# EAGLE board Address and TMP V1.0 (EAGLE 9.6.2)
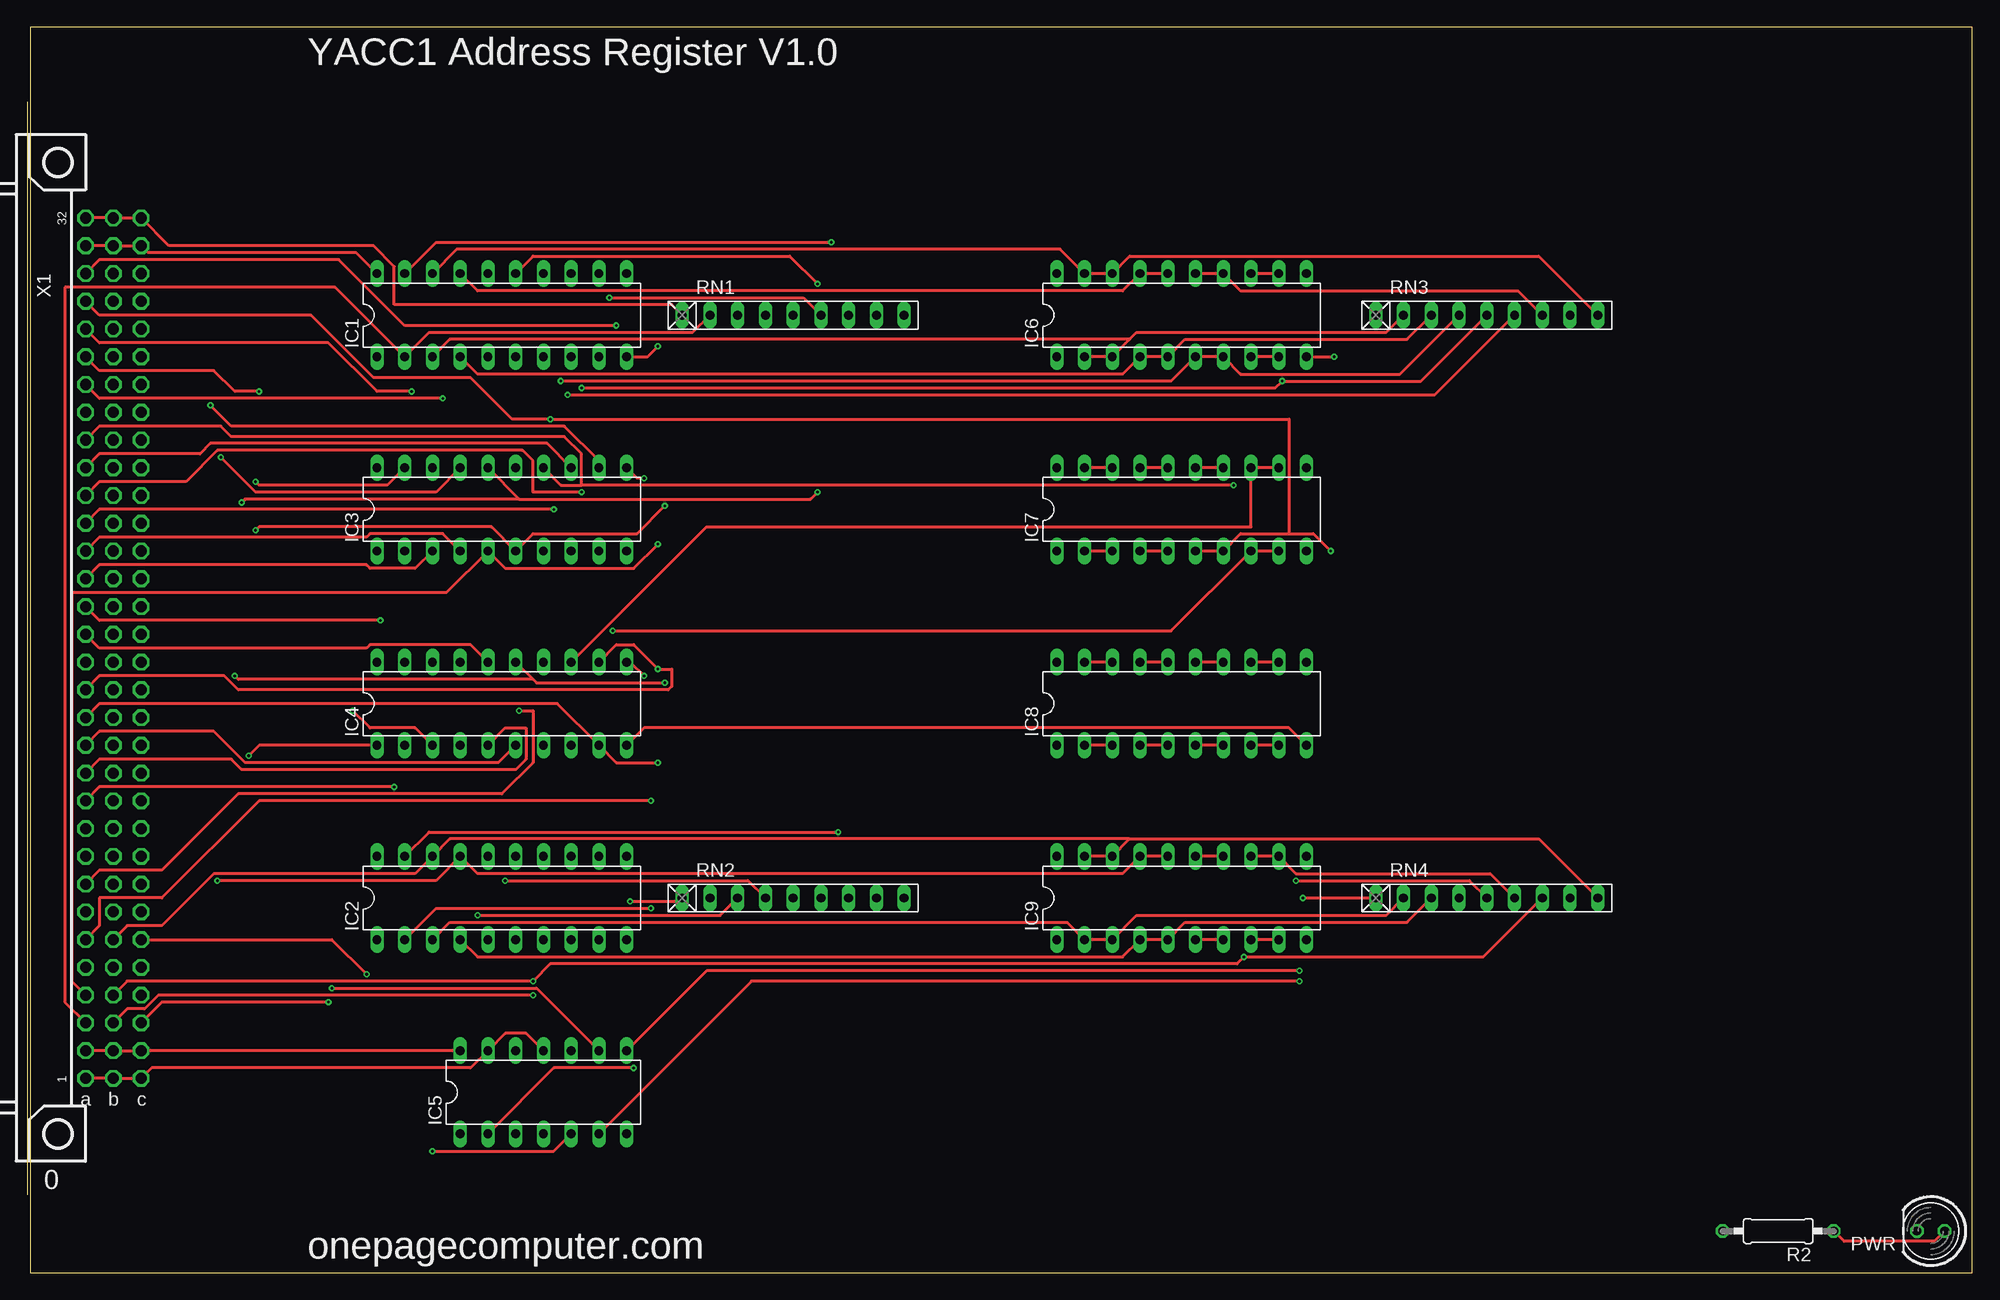
[diagram p0: board, top side]
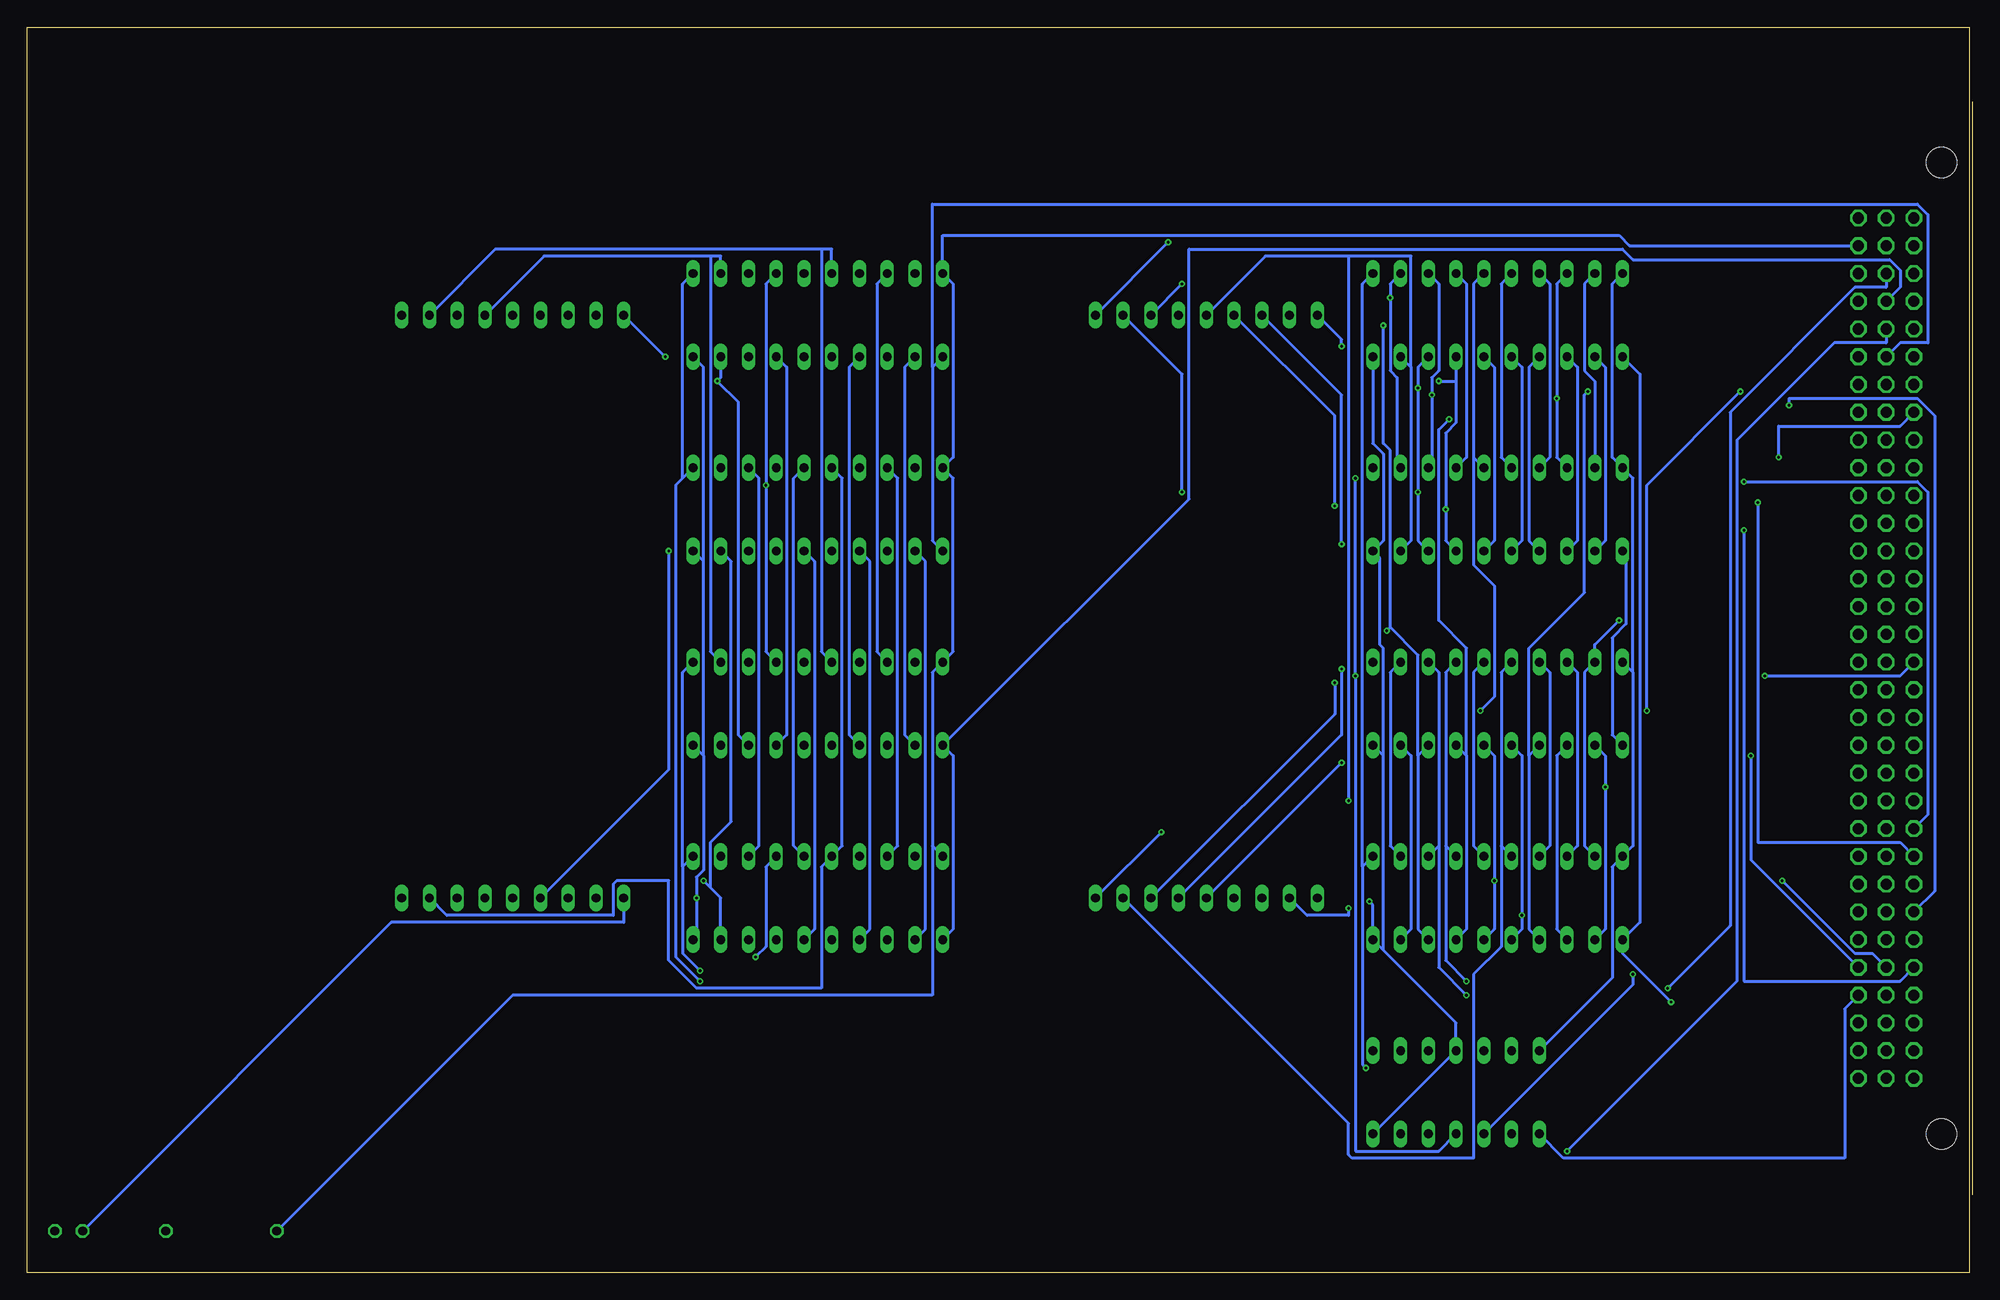
[diagram p1: board, bottom side, seen from below]

Size 177.78 x 113.97 mm. Coordinates in mm from the lower left corner, seen from the top.
Outline: 0,0 177.78,0 177.78,113.97 0,113.97 0,0
Copper layers (1*16): Top 0.035559375mm / dielectric 1.6mm / Bottom 0.035559375mm
Design rules "oshpark-2layer-auto-routing": minimum track width 10mil, minimum drill 10mil, track to track 10mil, track to pad 8mil, pad to pad 8mil, via to via 8mil, smd to smd 6mil, copper to edge 15mil, drill to drill 6mil, minimum pad ring 6mil, minimum via ring 6mil, stop-mask expansion 2.5mil, vias tented up to drill 0mil, thermal gap 10mil
Net classes: 1 GND: width 1 mm; 2 5V: width 1 mm

## Footprints (pad centres in the part's own frame; a part is rotated, then mirrored left to right if it is on the bottom)
DIL20 = drill 0.813 long: 1 -11.43,-3.81; 2 -8.89,-3.81; 3 -6.35,-3.81; 4 -3.81,-3.81; 5 -1.27,-3.81; 6 1.27,-3.81; 7 3.81,-3.81; 8 6.35,-3.81; 9 8.89,-3.81; 10 11.43,-3.81; 11 11.43,3.81; 12 8.89,3.81; 13 6.35,3.81; 14 3.81,3.81; 15 1.27,3.81; 16 -1.27,3.81; 17 -3.81,3.81; 18 -6.35,3.81; 19 -8.89,3.81; 20 -11.43,3.81
DIL14 = drill 0.813 long: 1 -7.62,-3.81; 2 -5.08,-3.81; 3 -2.54,-3.81; 4 0,-3.81; 5 2.54,-3.81; 6 5.08,-3.81; 7 7.62,-3.81; 8 7.62,3.81; 9 5.08,3.81; 10 2.54,3.81; 11 0,3.81; 12 -2.54,3.81; 13 -5.08,3.81; 14 -7.62,3.81
LED5MM = drill 0.813 octagon: A -1.27,0; K 1.27,0
0207/10 = drill 0.813 octagon: 1 -5.08,0; 2 5.08,0
RN-9 = drill 0.813 long: 1 -10.16,0; 2 -7.62,0; 3 -5.08,0; 4 -2.54,0; 5 0,0; 6 2.54,0; 7 5.08,0; 8 7.62,0; 9 10.16,0
FABC96R = drill 1.016 octagon: A1 -2.54,39.37; A2 -2.54,36.83; A3 -2.54,34.29; A4 -2.54,31.75; A5 -2.54,29.21; A6 -2.54,26.67; A7 -2.54,24.13; A8 -2.54,21.59; A9 -2.54,19.05; A10 -2.54,16.51; A11 -2.54,13.97; A12 -2.54,11.43; A13 -2.54,8.89; A14 -2.54,6.35; A15 -2.54,3.81; A16 -2.54,1.27; A17 -2.54,-1.27; A18 -2.54,-3.81; A19 -2.54,-6.35; A20 -2.54,-8.89; A21 -2.54,-11.43; A22 -2.54,-13.97; A23 -2.54,-16.51; A24 -2.54,-19.05; A25 -2.54,-21.59; A26 -2.54,-24.13; A27 -2.54,-26.67; A28 -2.54,-29.21; A29 -2.54,-31.75; A30 -2.54,-34.29; A31 -2.54,-36.83; A32 -2.54,-39.37; B1 -5.08,39.37; B2 -5.08,36.83; B3 -5.08,34.29; B4 -5.08,31.75; B5 -5.08,29.21; B6 -5.08,26.67; B7 -5.08,24.13; B8 -5.08,21.59; B9 -5.08,19.05; B10 -5.08,16.51; B11 -5.08,13.97; B12 -5.08,11.43; B13 -5.08,8.89; B14 -5.08,6.35; B15 -5.08,3.81; B16 -5.08,1.27; B17 -5.08,-1.27; B18 -5.08,-3.81; B19 -5.08,-6.35; B20 -5.08,-8.89; B21 -5.08,-11.43; B22 -5.08,-13.97; B23 -5.08,-16.51; B24 -5.08,-19.05; B25 -5.08,-21.59; B26 -5.08,-24.13; B27 -5.08,-26.67; B28 -5.08,-29.21; B29 -5.08,-31.75; B30 -5.08,-34.29; B31 -5.08,-36.83; B32 -5.08,-39.37; C1 -7.62,39.37; C2 -7.62,36.83; C3 -7.62,34.29; C4 -7.62,31.75; C5 -7.62,29.21; C6 -7.62,26.67; C7 -7.62,24.13; C8 -7.62,21.59; C9 -7.62,19.05; C10 -7.62,16.51; C11 -7.62,13.97; C12 -7.62,11.43; C13 -7.62,8.89; C14 -7.62,6.35; C15 -7.62,3.81; C16 -7.62,1.27; C17 -7.62,-1.27; C18 -7.62,-3.81; C19 -7.62,-6.35; C20 -7.62,-8.89; C21 -7.62,-11.43; C22 -7.62,-13.97; C23 -7.62,-16.51; C24 -7.62,-19.05; C25 -7.62,-21.59; C26 -7.62,-24.13; C27 -7.62,-26.67; C28 -7.62,-29.21; C29 -7.62,-31.75; C30 -7.62,-34.29; C31 -7.62,-36.83; C32 -7.62,-39.37 | hole 2.794: 0,-44.456; 0,44.456

## Placement (x,y rotation side)
IC1  74LS373N  [DIL20]  43.18,87.63 0 top
IC2  74LS373N  [DIL20]  43.18,34.29 0 top
IC3  74LS373N  [DIL20]  43.18,69.85 0 top
IC4  74LS373N  [DIL20]  43.18,52.07 0 top
IC5  74LS04N  [DIL14]  46.99,16.51 0 top
IC6  74LS373N  [DIL20]  105.41,87.63 0 top
IC7  74LS373N  [DIL20]  105.41,69.85 0 top
IC8  74LS373N  [DIL20]  105.41,52.07 0 top
IC9  74LS373N  [DIL20]  105.41,34.29 0 top
PWR  [LED5MM]  173.99,3.81 180 top
R2  330  [0207/10]  160.02,3.81 180 top
RN1  [RN-9]  69.85,87.63 0 top
RN2  [RN-9]  69.85,34.29 0 top
RN3  [RN-9]  133.35,87.63 0 top
RN4  [RN-9]  133.35,34.29 0 top
X1  FABC96R  [FABC96R]  2.54,57.15 180 top

## Library data of the parts
IC1-IC9 = 74xx-us
PWR = led
R2 = eagle-ltspice; SPICEMODEL: NONE; SPICEPREFIX: R
RN1-RN4 = resistor-net; OC_FARNELL: unknown; OC_NEWARK: unknown
X1 = con-vg

## Nets
-AC-LD: X1.C22
-AC-LD-INV: X1.C20
-AC-RD: X1.C21
-ADDR-REG-LD0: IC5.1 X1.C4
-ADDR-REG-LD1: IC5.3 X1.C6
-ADDR-REG-RD0: IC1.1 IC2.1 X1.C3
-ADDR-REG-RD1: IC3.1 IC4.1 X1.C5
-ALU-FUNC: X1.C15
-BUS-EN: X1.C28
-HL-SWAP: X1.C25
-INT: X1.C13
-INTA: X1.C14
-IO-ADDR-LD: X1.C11
-IO-RD: X1.B25
-IO-WR: X1.B26
-MEM-RD: X1.B23
-MEM-WR: X1.B24
-REG-DN: X1.B21
-REG-FUNC-LD: X1.B8
-REG-FUNC-RD: X1.B7
-REG-LD-HI: X1.B20
-REG-LD-LO: X1.B18
-REG-RD-HI: X1.B19
-REG-RD-LO: X1.B17
-REG-UP: X1.B22
-RESET: X1.C30
-RUN: X1.C29
-SR-LD: X1.C23
-TMP-REG-LD0: IC5.5 X1.B28
-TMP-REG-LD1: IC5.9 X1.B30
-TMP-REG-RD0: IC6.1 IC7.1 X1.B27
-TMP-REG-RD1: IC8.1 IC9.1 X1.B29
ADDR0: IC1.2 IC3.2 RN1.2 X1.A3
ADDR1: IC1.5 IC3.5 RN1.3 X1.A4
ADDR2: IC1.6 IC3.6 RN1.4 X1.A5
ADDR3: IC1.9 IC3.9 RN1.5 X1.A6
ADDR4: IC1.12 IC3.12 RN1.6 X1.A7
ADDR5: IC1.15 IC3.15 RN1.7 X1.A8
ADDR6: IC1.16 IC3.16 RN1.8 X1.A9
ADDR7: IC1.19 IC3.19 RN1.9 X1.A10
ADDR8: IC2.2 IC4.2 RN2.2 X1.A11
ADDR9: IC2.5 IC4.5 RN2.3 X1.A12
ADDR10: IC2.6 IC4.6 RN2.4 X1.A13
ADDR11: IC2.9 IC4.9 RN2.5 X1.A14
ADDR12: IC2.12 IC4.12 RN2.6 X1.A15
ADDR13: IC2.15 IC4.15 RN2.7 X1.A16
ADDR14: IC2.16 IC4.16 RN2.8 X1.A17
ADDR15: IC2.19 IC4.19 RN2.9 X1.A18
ALU0: X1.C16
ALU1: X1.C17
ALU2: X1.C18
ALU3: X1.C19
BR-COND: X1.C24
DATA0: IC1.3 IC3.3 IC6.2 IC6.3 IC8.2 IC8.3 RN3.2 X1.A19
DATA1: IC1.4 IC3.4 IC6.4 IC6.5 IC8.4 IC8.5 RN3.3 X1.A20
DATA2: IC1.7 IC3.7 IC6.6 IC6.7 IC8.6 IC8.7 RN3.4 X1.A21
DATA3: IC1.8 IC3.8 IC6.8 IC6.9 IC8.8 IC8.9 RN3.5 X1.A22
DATA4: IC1.13 IC3.13 IC6.12 IC6.13 IC8.12 IC8.13 RN3.6 X1.A23
DATA5: IC1.14 IC3.14 IC6.14 IC6.15 IC8.14 IC8.15 RN3.7 X1.A24
DATA6: IC1.17 IC3.17 IC6.16 IC6.17 IC8.16 IC8.17 RN3.8 X1.A25
DATA7: IC1.18 IC3.18 IC6.18 IC6.19 IC8.18 IC8.19 RN3.9 X1.A26
DATA8: IC2.3 IC4.3 IC7.2 IC7.3 IC9.2 IC9.3 RN4.2 X1.A27
DATA9: IC2.4 IC4.4 IC7.4 IC7.5 IC9.4 IC9.5 RN4.3 X1.A28
DATA10: IC2.7 IC4.7 IC7.6 IC7.7 IC9.6 IC9.7 RN4.4 X1.A29
DATA11: IC2.8 IC4.8 IC7.8 IC7.9 IC9.8 IC9.9 RN4.5 X1.A30
DATA12: IC2.13 IC4.13 IC7.12 IC7.13 IC9.12 IC9.13 RN4.6 X1.B3
DATA13: IC2.14 IC4.14 IC7.14 IC7.15 IC9.14 IC9.15 RN4.7 X1.B4
DATA14: IC2.17 IC4.17 IC7.16 IC7.17 IC9.16 IC9.17 RN4.8 X1.B5
DATA15: IC2.18 IC4.18 IC7.18 IC7.19 IC9.18 IC9.19 RN4.9 X1.B6
GND: IC1.10 IC2.10 IC3.10 IC4.10 IC5.7 IC5.11 IC5.13 IC6.10 IC7.10 IC8.10 IC9.10 PWR.K RN1.1 RN2.1 RN3.1 RN4.1 X1.A1 X1.A32 X1.B1 X1.B32 X1.C1 X1.C32
IN: X1.C26
IO-ADDR0: X1.C7
IO-ADDR1: X1.C8
IO-ADDR2: X1.C9
IO-ADDR3: X1.C10
N$1: IC1.11 IC2.11 IC5.2
N$2: IC3.11 IC4.11 IC5.4
N$3: IC5.6 IC6.11 IC7.11
N$4: IC5.8 IC8.11 IC9.11
N$11: PWR.A R2.1
OUT: X1.C27
REG-LD-ID0: X1.B13
REG-LD-ID1: X1.B14
REG-LD-ID2: X1.B15
REG-LD-ID3: X1.B16
REG-RD-ID0: X1.B9
REG-RD-ID1: X1.B10
REG-RD-ID2: X1.B11
REG-RD-ID3: X1.B12
UNUSED0: X1.C12
VCC: IC1.20 IC2.20 IC3.20 IC4.20 IC5.14 IC6.20 IC7.20 IC8.20 IC9.20 R2.2 X1.A2 X1.A31 X1.B2 X1.B31 X1.C2 X1.C31

## Tracks (layer width: path | path; a pad name or v marks a point on that pad's centre or on a via)
-ADDR-REG-LD0
  Bottom 0.254: IC5.1 37.15,10.48 11.43,10.48 11.43,24.13 X1.C4
-ADDR-REG-LD1  (via drill 0.25)
  Top 0.254: v30.8,27.3 27.62,30.48 X1.C6
  Bottom 0.254: IC5.3 30.8,26.35 v30.8,27.3
-ADDR-REG-RD0  (via drill 0.25)
  Top 0.254: X1.C3 12.06,24.77 v27.3,24.77
  Bottom 0.254: IC1.1 30.16,82.23 30.16,32.07 IC2.1 31.75,29.21 v27.3,24.77
-ADDR-REG-RD1  (via drill 0.25)
  Top 0.254: v20,47.31 20.95,48.26 IC4.1
  Bottom 0.254: IC4.1 32.7,49.21 32.7,58.1 31.43,59.37 31.43,65.72 IC3.1 | X1.C5 20,37.78 v20,47.31
-TMP-REG-LD0  (via drill 0.25)
  Top 0.254: IC5.5 47.94,11.11 v36.83,11.11
  Bottom 0.254: v36.83,11.11 21.27,26.67 21.27,76.2 12.38,85.09 7.62,85.09 X1.B28
-TMP-REG-LD1  (via drill 0.25)
  Top 0.254: IC5.9 46.35,26.04 v27.62,26.04
  Bottom 0.254: v27.62,26.04 21.91,31.75 21.91,78.74 10.48,90.17 7.62,90.17 X1.B30
-TMP-REG-RD0
  Bottom 0.254: IC7.1 94.93,66.99 94.93,82.87 | IC6.1 94.93,82.87 | X1.B27 6.35,85.09 3.81,85.09 3.81,96.84 4.76,97.79 94.93,97.79 94.93,82.87
-TMP-REG-RD1
  Bottom 0.254: IC9.1 93.03,31.43 93.03,47.31 IC8.1 71.44,70.8 71.44,93.66 31.75,93.66 30.8,92.71 7.3,92.71 6.35,91.76 6.35,90.17 X1.B29
ADDR0
  Top 0.254: RN1.2 60.64,86.04 36.51,86.04 IC1.2 27.94,90.17 3.17,90.17 3.17,24.77 X1.A3
  Bottom 0.254: IC3.2 33.34,66.99 33.34,82.87 IC1.2
ADDR1  (via drill 0.25)
  Top 0.254: v57.47,66.67 55.24,64.45 43.5,64.45 IC3.5 38.1,62.23 3.81,62.23 3.81,26.67 X1.A4
  Bottom 0.254: IC3.5 40.96,66.99 40.96,82.87 IC1.5 | RN1.3 57.47,80.33 v57.47,66.67
ADDR2  (via drill 0.25)
  Top 0.254: v58.1,70.17 55.56,67.63 46.04,67.63 IC3.6 42.23,68.26 20.95,68.26 v20.64,67.94
  Bottom 0.254: IC3.6 43.5,66.99 43.5,82.87 IC1.6 | RN1.4 58.1,78.42 v58.1,70.17 | X1.A5 6.35,26.67 20.64,26.67 v20.64,67.94
ADDR3  (via drill 0.25)
  Top 0.254: X1.A6 6.35,31.75 6.35,34.29 12.06,34.29 20.95,43.18 v56.83,43.18
  Bottom 0.254: IC3.9 51.12,66.99 51.12,82.87 | IC1.9 51.12,82.87 | RN1.5 64.45,93.03 56.83,93.03 | 56.83,93.03 51.12,93.03 51.12,82.87 | 56.83,93.03 v56.83,43.18
ADDR4  (via drill 0.25)
  Top 0.254: RN1.6 70.8,89.22 v53.02,89.22 | v16.51,79.38 18.41,77.47 48.9,77.47 52.07,74.3 IC3.12
  Bottom 0.254: IC3.12 52.39,73.98 52.39,81.92 53.02,82.55 v53.02,89.22 53.02,90.49 IC1.12 | X1.A7 3.17,34.92 3.17,78.42 4.76,80.01 16.51,80.01 v16.51,79.38
ADDR5  (via drill 0.25)
  Top 0.254: v72.07,90.49 69.53,93.03 46.04,93.03 IC1.15 | X1.A8 6.35,36.83 12.06,36.83 19.05,43.81 43.18,43.81 46.04,46.67 46.04,51.44 v44.77,51.44
  Bottom 0.254: 45.4,74.61 IC3.15 | 45.4,74.61 45.4,90.49 IC1.15 | v72.07,90.49 RN1.7 | v44.77,51.44 43.5,52.7 43.5,62.87 45.4,64.77 45.4,74.61
ADDR6  (via drill 0.25)
  Top 0.254: v72.07,71.44 71.44,70.8 44.77,70.8 | IC3.16 44.77,70.8 | v19.37,70.48 19.68,70.8 44.77,70.8
  Bottom 0.254: IC3.16 42.86,74.61 42.86,90.49 IC1.16 | RN1.8 72.07,82.23 v72.07,71.44 | X1.A9 6.35,39.37 19.37,39.37 v19.37,70.48
ADDR7  (via drill 0.25)
  Top 0.254: v73.34,94.3 37.15,94.3 IC1.19 | v20.64,72.39 20.95,72.07 32.7,72.07 IC3.19
  Bottom 0.254: IC3.19 34.29,81.6 35.24,82.55 35.24,90.49 IC1.19 | v73.34,94.3 RN1.9 | X1.A10 3.81,41.91 3.81,71.44 4.76,72.39 v20.64,72.39
ADDR8  (via drill 0.25)
  Top 0.254: v56.83,33.34 37.15,33.34 IC2.2 | X1.A11 6.35,44.45 v33.34,44.45
  Bottom 0.254: IC2.2 33.34,31.43 v33.34,44.45 33.34,47.31 IC4.2 | RN2.2 60.64,32.7 56.83,32.7 v56.83,33.34
ADDR9  (via drill 0.25)
  Top 0.254: RN2.3 63.18,32.7 v40.96,32.7 | X1.A12 6.35,46.99 18.41,46.99 19.37,46.04 44.45,46.04 45.4,46.99 45.4,49.85 43.5,49.85 IC4.5
  Bottom 0.254: IC2.5 40.96,31.43 v40.96,32.7 40.96,47.31 IC4.5
ADDR10  (via drill 0.25)
  Top 0.254: RN2.4 65.72,35.88 v43.5,35.88 | X1.A13 6.35,49.53 16.83,49.53 19.68,46.67 42.86,46.67 IC4.6
  Bottom 0.254: IC2.6 43.5,31.43 v43.5,35.88 43.5,47.31 IC4.6
ADDR11  (via drill 0.25)
  Top 0.254: v57.47,46.67 53.66,46.67 IC4.9 48.26,52.07 6.35,52.07 X1.A14
  Bottom 0.254: IC2.9 51.12,31.43 51.12,47.31 IC4.9 | v57.47,46.67 RN2.5
ADDR12  (via drill 0.25)
  Top 0.254: IC4.12 53.66,57.47 55.24,57.47 v57.47,55.24 58.74,55.24 58.74,53.66 58.42,53.34 19.05,53.34 17.78,54.61 6.35,54.61 X1.A15
  Bottom 0.254: IC2.12 53.02,39.05 53.02,54.93 IC4.12 | RN2.6 57.47,49.21 v57.47,55.24
ADDR13  (via drill 0.25)
  Top 0.254: v58.1,53.98 46.35,53.98 46.04,54.29 | IC4.15 46.04,54.29 | v18.73,54.61 19.05,54.29 46.04,54.29
  Bottom 0.254: IC2.15 45.4,39.05 45.4,54.93 IC4.15 | RN2.7 58.1,51.12 v58.1,53.98 | X1.A16 6.35,54.61 v18.73,54.61
ADDR14
  Top 0.254: X1.A17 6.35,57.15 30.8,57.15 31.11,57.47 40.32,57.47 IC4.16
  Bottom 0.254: 42.86,39.05 IC2.16 | 42.86,39.05 42.86,54.93 IC4.16 | RN2.8 56.83,13.65 56.83,10.79 56.52,10.48 45.4,10.48 45.4,27.3 42.86,29.84 42.86,39.05
ADDR15  (via drill 0.25)
  Top 0.254: v73.98,40.32 36.51,40.32 IC2.19 | X1.A18 6.35,59.69 v32.07,59.69
  Bottom 0.254: IC2.19 35.24,39.05 35.24,54.93 IC4.19 34.29,57.47 v32.07,59.69 | v73.98,40.32 RN2.9
DATA0
  Top 0.254: X1.A19 6.35,64.77 30.8,64.77 31.11,64.45 35.24,64.45 IC3.3 | IC8.3 IC8.2 | IC6.2 IC6.3 100.65,85.41 | RN3.2 124.14,86.04 101.28,86.04 100.65,85.41 | IC1.3 38.42,85.41 100.65,85.41
  Bottom 0.254: IC3.3 35.88,66.99 35.88,82.87 IC1.3 | IC8.2 97.47,49.21 97.47,82.87 IC6.2
DATA1
  Top 0.254: X1.A20 6.35,67.31 30.8,67.31 31.11,67.63 37.78,67.63 IC3.4 | IC8.5 IC8.4 | RN3.3 126.05,85.41 105.73,85.41 IC6.5 IC6.4 100.01,82.23 40.96,82.23 IC1.4
  Bottom 0.254: IC3.4 40.32,66.99 40.32,82.87 IC1.4 | IC8.4 102.55,49.21 102.55,82.87 IC6.4
DATA2  (via drill 0.25)
  Top 0.254: X1.A21 6.35,69.85 v47.94,69.85 | IC8.7 IC8.6 | RN3.4 125.41,82.23 110.81,82.23 IC6.7 IC6.6 104.46,81.6 v48.58,81.6
  Bottom 0.254: IC3.7 47.94,66.99 v47.94,69.85 47.94,76.83 46.99,77.79 46.99,81.6 | IC1.7 46.99,81.6 | IC8.7 108.27,49.21 108.27,82.87 IC6.7 | v48.58,81.6 46.99,81.6
DATA3  (via drill 0.25)
  Top 0.254: IC8.9 IC8.8 | IC6.9 IC6.8 | RN3.5 127.32,81.6 v114.62,81.6 113.98,80.96 v50.48,80.96 | X1.A22 6.35,72.39 14.29,72.39 17.14,75.25 45.09,75.25 46.04,74.3 46.04,71.44 v50.48,71.44
  Bottom 0.254: IC6.9 114.3,81.92 v114.62,81.6 112.71,79.69 112.71,49.21 IC8.8 | IC3.8 50.48,66.99 v50.48,71.44 v50.48,80.96 50.48,82.87 IC1.8
DATA4  (via drill 0.25)
  Top 0.254: IC8.12 IC8.13 | IC6.12 IC6.13 | X1.A23 6.35,74.93 15.56,74.93 16.51,75.88 47.31,75.88 IC3.13 | RN3.6 128.59,80.33 v49.21,80.33
  Bottom 0.254: RN3.6 130.49,93.03 115.25,93.03 | 115.25,93.03 114.3,93.03 IC6.12 | IC8.12 115.25,56.83 115.25,93.03 | IC3.13 49.21,73.98 v49.21,80.33 49.21,81.92 48.58,82.55 48.58,90.49 IC1.13
DATA5  (via drill 0.25)
  Top 0.254: X1.A24 6.35,77.47 17.46,77.47 18.41,76.52 48.9,76.52 50.48,74.93 50.48,72.07 | 50.48,72.07 48.58,72.07 IC3.14 | IC8.14 IC8.15 | IC6.15 IC6.14 110.81,89.85 136.21,89.85 RN3.7 | v110.17,72.07 50.48,72.07
  Bottom 0.254: IC3.14 46.04,74.61 46.04,90.49 IC1.14 | IC8.14 110.17,56.83 v110.17,72.07 110.17,90.49 IC6.14
DATA6  (via drill 0.25)
  Top 0.254: v17.46,74.61 20.64,71.44 37.15,71.44 IC3.17 | IC8.16 IC8.17 | IC6.16 IC6.17 100.01,89.85 40.96,89.85 IC1.17
  Bottom 0.254: IC3.17 38.42,74.61 38.42,90.49 IC1.17 | X1.A25 6.35,77.47 17.46,77.47 v17.46,74.61 | RN3.8 134.94,93.66 105.09,93.66 | 105.09,93.66 104.14,93.66 IC6.16 | IC8.16 105.09,56.83 105.09,93.66
DATA7  (via drill 0.25)
  Top 0.254: X1.A26 6.35,80.01 v37.78,80.01 | IC8.18 IC8.19 | RN3.9 138.11,93.03 100.65,93.03 IC6.18 IC6.19 94.3,93.66 39.05,93.66 IC1.18
  Bottom 0.254: IC3.18 37.78,74.61 v37.78,80.01 37.78,90.49 IC1.18 | IC8.18 100.01,56.83 100.01,90.49 IC6.18
DATA8  (via drill 0.25)
  Top 0.254: IC7.3 IC7.2 | RN4.2 124.14,32.7 101.28,32.7 IC9.3 IC9.2 94.93,32.07 38.42,32.07 IC2.3 | X1.A27 6.35,82.55 16.83,82.55 18.73,80.64 v20.95,80.64 | v29.53,51.44 31.11,49.85 35.24,49.85 IC4.3
  Bottom 0.254: IC7.2 95.57,65.09 95.57,31.43 IC9.2 | IC2.3 37.78,31.43 37.78,47.31 IC4.3 | v20.95,80.64 29.53,72.07 v29.53,51.44
DATA9  (via drill 0.25)
  Top 0.254: IC7.5 IC7.4 | RN4.3 126.05,32.07 105.73,32.07 IC9.5 IC9.4 100.01,28.89 40.96,28.89 IC2.4 | X1.A28 6.35,85.09 27.3,85.09 31.75,80.64 v34.92,80.64
  Bottom 0.254: IC7.4 100.65,65.09 100.65,31.43 IC9.4 | IC2.4 40.32,31.43 40.32,47.31 | IC4.4 40.32,47.31 | v34.92,80.64 35.24,80.33 35.24,62.23 40.32,57.15 40.32,47.31
DATA10  (via drill 0.25)
  Top 0.254: IC9.7 IC9.6 | IC7.6 IC7.7 110.81,67.63 115.25,67.63 | v119.06,66.04 117.47,67.63 115.25,67.63 | X1.A29 6.35,87.63 25.72,87.63 31.43,81.92 40.32,81.92 44.13,78.11 v47.62,78.11 115.25,78.11 115.25,67.63
  Bottom 0.254: RN4.4 119.06,46.04 v119.06,66.04 | IC9.6 105.73,31.43 105.73,65.09 IC7.6 | IC2.7 46.04,31.43 46.04,47.31 | IC4.7 46.04,47.31 | v47.62,78.11 48.58,77.15 48.58,59.69 46.04,57.15 46.04,47.31
DATA11  (via drill 0.25)
  Top 0.254: IC7.9 IC7.8 104.46,58.74 v53.34,58.74 | IC9.9 IC9.8 | RN4.5 131.76,35.88 v115.89,35.88 | X1.A30 6.35,92.71 28.26,92.71 34.29,86.68 v53.66,86.68
  Bottom 0.254: 115.25,35.24 114.3,34.29 IC9.9 | 115.25,35.24 v115.89,35.88 | IC7.9 113.35,65.09 113.35,41.27 115.25,39.37 115.25,35.24 | IC2.8 50.48,31.43 50.48,47.31 | IC4.8 50.48,47.31 | v53.66,86.68 53.66,75.88 53.02,75.25 53.02,59.05 | 53.02,59.05 50.48,56.52 50.48,47.31 | 53.02,59.05 v53.34,58.74
DATA12  (via drill 0.25)
  Top 0.254: IC7.12 IC7.13 111.76,68.26 61.91,68.26 IC4.13 | IC9.13 IC9.12 115.89,36.51 133.67,36.51 RN4.6 | X1.B3 8.89,24.13 10.48,24.13 11.75,25.4 v46.04,25.4
  Bottom 0.254: IC7.13 110.81,72.71 110.81,39.05 IC9.13 | 48.58,39.05 IC2.13 | 48.58,39.05 48.58,54.93 IC4.13 | v46.04,25.4 48.58,27.94 48.58,39.05
DATA13  (via drill 0.25)
  Top 0.254: X1.B4 8.89,26.67 v46.04,26.67 47.62,28.26 110.49,28.26 v111.12,28.89 133.03,28.89 RN4.7 | IC7.14 IC7.15 | IC9.14 IC9.15
  Bottom 0.254: 47.94,39.05 IC2.14 | 47.94,39.05 47.94,54.93 IC4.14 | v46.04,26.67 47.94,28.57 47.94,39.05 | v111.12,28.89 110.17,29.84 110.17,37.15 IC9.14 | IC7.15 107.63,72.71 107.63,39.05 IC9.15
DATA14  (via drill 0.25)
  Top 0.254: v17.14,35.88 37.15,35.88 IC2.17 40.96,36.51 100.01,36.51 IC9.17 IC9.16 | IC7.16 IC7.17
  Bottom 0.254: IC2.17 38.42,39.05 38.42,54.93 IC4.17 | X1.B5 8.89,29.21 10.48,29.21 v17.14,35.88 | RN4.8 139.38,32.7 124.14,32.7 124.14,35.56 123.83,35.88 119.06,35.88 119.06,28.57 116.52,26.04 105.09,26.04 105.09,37.15 IC9.16 103.19,39.05 103.19,72.71 IC7.16
DATA15
  Top 0.254: X1.B6 8.89,31.75 12.06,31.75 16.83,36.51 35.24,36.51 IC2.18 38.42,39.69 100.65,39.69 | IC7.18 IC7.19 | IC9.19 IC9.18 100.65,39.69 | RN4.9 138.11,39.69 100.65,39.69
  Bottom 0.254: IC2.18 35.88,39.05 35.88,54.93 IC4.18 | IC7.18 98.11,72.71 98.11,39.05 IC9.18
GND  (via drill 0.25)
  Top 0.254: X1.A32 X1.B32 X1.C32 12.7,93.98 31.43,93.98 33.34,92.08 33.34,88.58 58.74,88.58 RN1.1 | v57.47,84.77 56.52,83.82 IC1.10 | X1.A1 X1.B1 X1.C1 11.11,18.73 40.32,18.73 IC5.13 43.5,21.91 45.4,21.91 IC5.11 | RN2.1 59.37,33.97 v54.93,33.97 | v116.52,34.29 RN4.1 | IC6.10 v119.38,83.82 | IC4.10 56.2,49.85 115.25,49.85 IC8.10
  Bottom 0.254: IC1.10 54.61,75.88 53.66,74.93 53.66,66.99 IC3.10 53.98,65.41 53.98,57.47 53.66,57.15 53.66,47.31 | RN1.1 57.47,85.41 v57.47,84.77 | IC5.7 IC5.11 46.99,22.86 53.66,29.53 | 53.66,29.53 IC2.10 54.61,33.66 v54.93,33.97 | 53.66,47.31 IC4.10 | 53.66,29.53 53.66,47.31 | IC9.10 116.52,30.8 v116.52,34.29 116.52,36.2 115.89,36.83 115.89,47.31 | IC8.10 115.89,47.31 | PWR.K 144.46,32.07 123.19,32.07 RN4.1 | 115.89,65.09 IC7.10 | 115.89,47.31 115.89,65.09 | IC6.10 115.89,82.87 115.89,65.09 | v119.38,83.82 RN3.1
N$1  (via drill 0.25)
  Top 0.254: IC5.2 47.94,18.73 v55.24,18.73
  Bottom 0.254: v55.24,18.73 55.56,19.05 55.56,37.15 | IC2.11 55.56,37.15 | IC1.11 55.56,90.49 55.56,37.15
N$2  (via drill 0.25)
  Top 0.254: v56.2,54.61 54.93,55.88 IC4.11 | IC3.11 55.56,72.71 v56.2,72.71
  Bottom 0.254: IC5.4 48.58,11.11 56.2,11.11 v56.2,54.61 v56.2,72.71
N$3  (via drill 0.25)
  Top 0.254: IC5.6 66.04,26.67 v116.2,26.67
  Bottom 0.254: v116.2,26.67 118.43,28.89 118.43,72.07 117.79,72.71 | IC7.11 117.79,72.71 | IC6.11 117.79,90.49 117.79,72.71
N$4  (via drill 0.25)
  Top 0.254: IC5.8 61.91,27.62 v116.2,27.62
  Bottom 0.254: v116.2,27.62 117.79,29.21 117.79,37.15 | IC9.11 117.79,37.15 | IC8.11 117.79,54.93 117.79,37.15
N$11
  Top 0.254: R2.1 166.05,2.86 174.31,2.86 PWR.A
VCC
  Top 0.254: X1.A31 X1.B31 X1.C31 10.79,93.34 29.84,93.34 IC1.20 | X1.A2 X1.B2 X1.C2 IC5.14
  Bottom 0.254: 30.8,54.93 30.8,39.05 IC2.20 32.7,37.15 32.7,26.99 IC5.14 | IC4.20 30.8,54.93 | 30.8,54.93 30.8,72.71 IC3.20 32.7,74.61 32.7,90.49 IC1.20 | 94.93,39.05 IC9.20 | 94.93,39.05 94.93,54.93 IC8.20 93.03,56.83 93.03,72.71 IC7.20 93.03,74.61 93.03,90.49 IC6.20 93.98,94.93 32.07,94.93 31.11,93.98 X1.C31 | R2.2 133.35,25.4 94.93,25.4 94.93,39.05

## Text on the board
tNames: YACC1 Address Register V1.0 | 0 | onepagecomputer.com